# Allegro board 08_037158b.brd
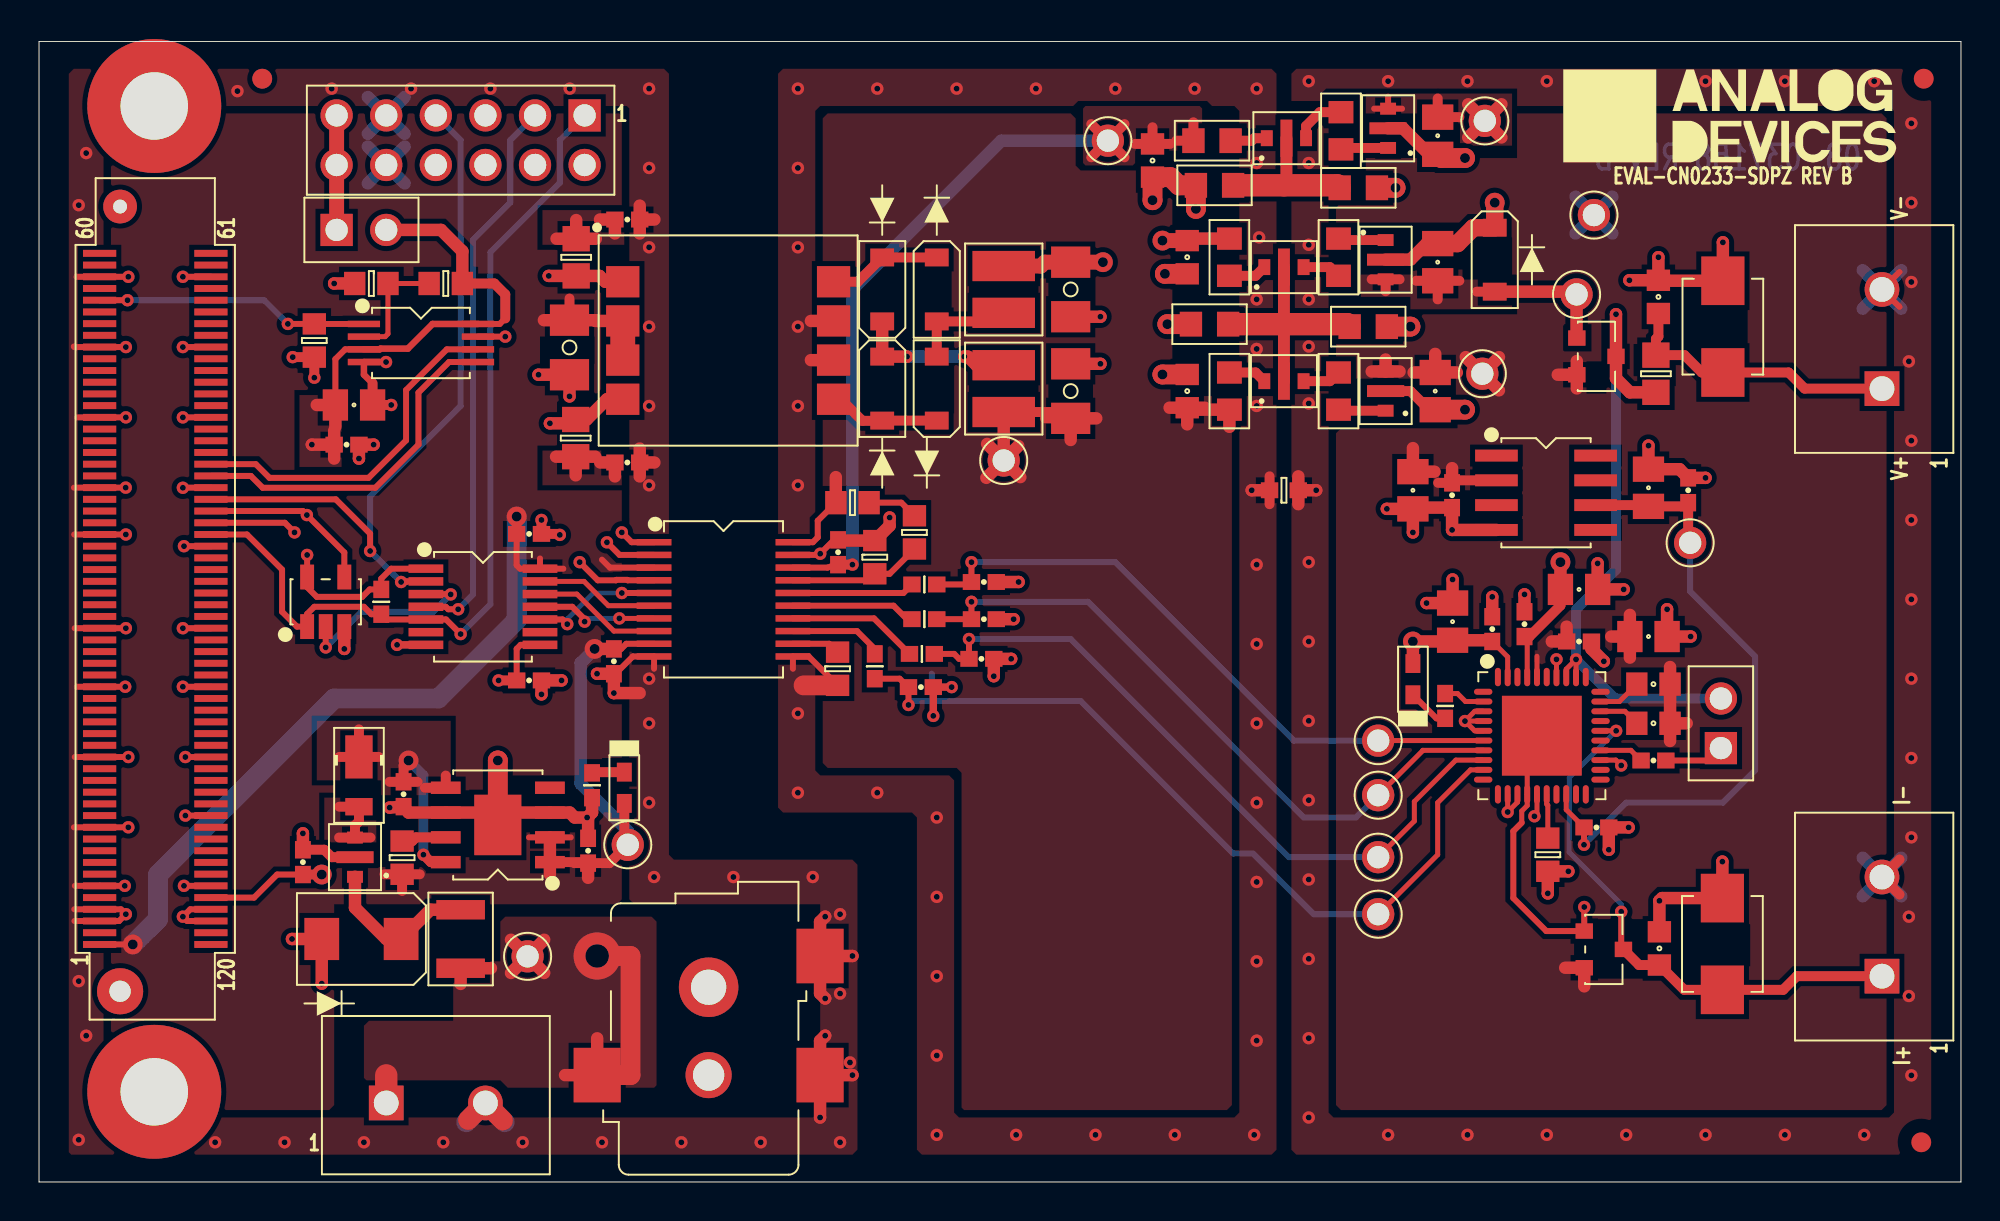
[diagram p0: board, top side]
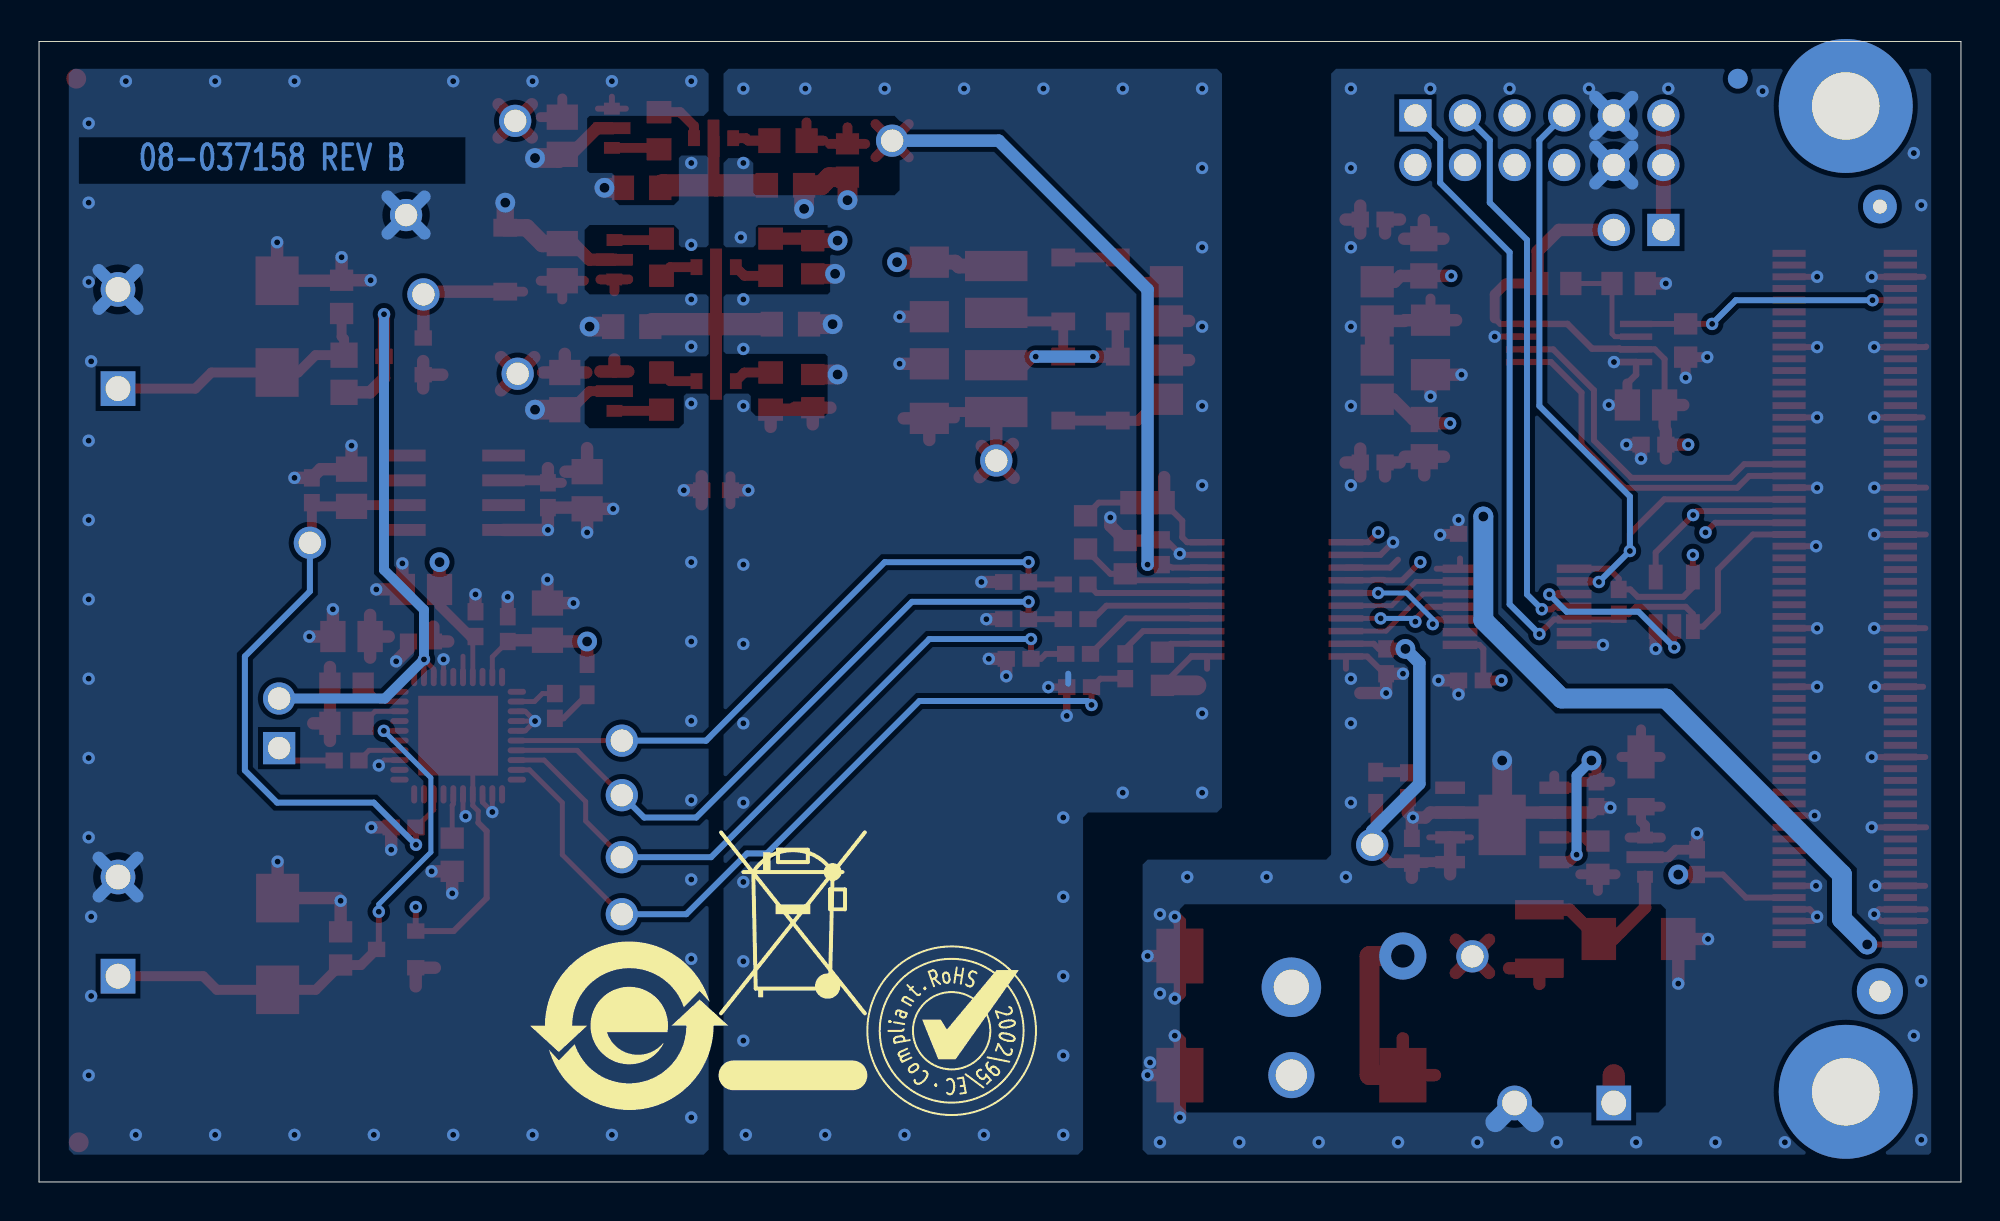
[diagram p1: board, bottom side, seen from below]

Outline 98.43 x 58.42 mm; copper layers: TOP, L2_GND, L3_PWR, BOTTOM. Coordinates in mm from the lower left corner of the outline.
Outline path: 0,58.42 0,0 98.43,0 98.43,58.42 0,58.42

## Placement (name value [footprint] x y rotation side)
AVDD  TESTPAD  [TPC65D45]  73.91 41.4 270 top
AVSS  TESTPAD  [TPC65D45]  78.74 45.47 0 top
C1  100pF  [C0402]  30.13 49.3 180 top
C2  100pF  [C0402]  30.13 36.86 180 top
C3  0.1uF  [C0402]  29.44 26.67 90 top
C4  47uF  [C1206H71]  27.17 42.75 90 top
C5  0.1uF  [C0402]  40.92 32.26 90 top
C6  1uF  [C0402]  18.67 19.86 90 top
C7  100pF  [C0402]  45.16 25.35 180 top
C8  47uF  [C1206H71]  52.83 40.51 270 top
C9  47uF  [C1206H71]  52.83 45.72 270 top
C10  100pF  [C0402]  48.26 26.8 180 top
C11  100pF  [C0402]  48.39 28.83 180 top
C12  100pF  [C0402]  48.39 30.73 180 top
C13  1uF  [C0402]  28.12 16.97 270 top
C14  1UF  [C0603]  57.02 52.32 90 top
C15  1UF  [C0603]  58.8 40.51 270 top
C16  1UF  [C0603]  58.8 47.37 270 top
C17  10uF  [C0805]  71.63 47.12 90 top
C18  10uF  [C0805]  71.63 53.59 90 top
C19  10uF  [C0805]  71.5 40.51 90 top
C20  0.1uF  [C0402]  13.51 16.38 270 top
C21  10uF  [C0805]  16.13 39.8 180 top
C22  0.1UF  [C0402]  15.75 37.77 180 top
C23  0.1uF  [C0402]  25.1 25.69 180 top
C24  0.1uF  [C0402]  25.1 33.2 180 top
C25  10uF  [C0805]  78.87 30.35 180 top
C26  0.1uF  [C0402]  76.07 28.57 270 top
C27  3900PF  [C0402]  82.68 21.59 180 top
C28  10uF  [C0805]  70.36 35.43 90 top
C29  0.1uF  [C0402]  72.36 35.18 90 top
C30  10uF  [C0805]  72.39 28.7 270 top
C31  0.1uF  [C0402]  74.42 28.32 270 top
C32  22NF  [C0603]  82.68 25.5 0 top
C33  2.2uF  [C0603]  82.68 23.49 0 top
C34  10uF  [C0805]  82.42 35.56 270 top
C35  10uF  [C0805]  82.42 27.94 180 top
C36  0.1uF  [C0402]  84.46 35.43 270 top
C37  0.1uF  [C0402]  78.87 27.69 180 top
C38  0.1uF  [C0402]  79.76 18.16 180 top
C39  100PF  [C0603]  82.93 45.34 270 top
C40  100PF  [C0603]  82.98 11.96 270 top
CR1  SMBJ5342B-TP  [DO214AA3]  16.51 12.45 180 top
CR2  BAS70-04LT1G  [SOT23-M3]  79.76 42.29 270 top
CR3  BAS70-04LT1G  [SOT23-M3]  80.14 11.91 270 top
CR4  MMSZ5253B  [SOD123-2]  74.55 47.24 270 top
D1  SBR2U30P1-7  [POWERDI123]  16.38 20.83 270 top
D2  MBR0540T1G  [SOD123-2]  43.18 45.72 90 top
D3  MBR0540T1G  [SOD123-2]  45.97 45.72 270 top
D4  MBR0540T1G  [SOD123-2]  43.18 40.64 270 top
D5  MBR0540T1G  [SOD123-2]  45.97 40.64 90 top
D6  SMBJ20CA  [DO214AA-5]  86.23 43.81 270 top
D7  SMBJ20CA  [DO214AA-5]  86.21 12.19 270 top
DS1  SML-310MTT86  [LED0603]  29.97 20.19 270 top
DS2  SML-310LTT86  [LED0603]  70.36 25.76 90 top
E1  330OHM  [L0805]  60.96 40.51 90 top
E2  330OHM  [L0805]  59.94 43.94 0 top
E3  330OHM  [L0805]  60.96 47.37 270 top
E4  330OHM  [L0805]  60.07 53.34 0 top
E5  330OHM  [L0805]  60.2 51.05 0 top
E6  330OHM  [L0805]  66.67 53.85 270 top
E7  330OHM  [L0805]  67.56 50.93 0 top
E8  330OHM  [L0805]  66.55 40.51 270 top
E9  330OHM  [L0805]  68.07 43.81 0 top
E10  330OHM  [L0805]  66.55 47.37 90 top
E12  600OHM  [L0603]  63.75 35.43 0 top
F1  0.35A  [F1210]  21.59 12.45 90 top
FL1  0.1uF  [FSM0805L79W49H34]  16.18 16.64 90 top
FL2  0.1uF  [FSM0805L79W49H34]  63.75 46.86 0 top
FL3  0.1uF  [FSM0805L79W49H34]  63.75 41.02 0 top
FL4  0.1uF  [FSM0805L79W49H34]  63.88 53.47 0 top
FL5  0.1uF  [FSM0805L79W49H34]  68.96 47.24 270 top
FL6  0.1uF  [FSM0805L79W49H34]  69.09 53.98 90 top
FL7  0.1uF  [FSM0805L79W49H34]  68.96 40.51 90 top
GND  TESTPAD  [TPC65D45]  79.63 49.53 0 top
IOUT  OSTTC022162  [CNHDR1X2H406]  94.38 10.54 90 top
L1  47uH  [L1212H59_A]  49.4 40.64 270 top
L2  47uH  [L1212H59_A]  49.4 45.72 90 top
LATCH  TESTPAD  [TPC65D45]  68.58 22.61 270 top
NOREF  -  []  98.43 0 90 top
NOREF#2  -  []  -175.26 -210.57 0 top
NOREF#3  -  []  0 2.82 0 top
NOREF#4  -  [unnamed#2]  96.52 56.52 0 top
NOREF#5  -  []  -182.88 -219.71 0 top
NOREF#6  -  [unnamed#2]  96.39 2.03 0 top
NOREF#7  -  []  -184.15 -220.98 0 top
NOREF#8  -  []  0 58.42 0 top
NOREF#9  -  []  0 0 0 top
NOREF#10  -  []  0 58.42 270 top
NOREF#11  -  []  182.25 256.79 0 top
NOREF#12  -  []  98.43 58.42 180 top
NOREF#13  -  []  11.43 56.52 0 top
NOREF#14  -  []  0 0 0 top
NOREF#15  -  []  46.35 90.81 0 top
NOREF#16  -  []  0 0 0 top
NOREF#17  -  []  98.43 58.42 0 top
NOREF#18  -  []  -37.08 257.94 0 top
NOREF#19  -  []  -125.48 250.82 0 top
NOREF#20  -  []  11.43 56.52 0 top
NOREF#21  -  []  0 58.42 0 top
NOREF#22  -  []  86.61 54.61 0 top
NOREF#23  -  [unnamed#2]  11.43 56.52 0 top
NOREF#24  -  []  93.61 0 90 top
NOREF#25  -  []  50.55 21.59 180 bottom
NOREF#26  -  []  175.39 4.57 180 bottom
NOREF#27  -  [unnamed#2]  11.43 56.52 180 bottom
NOREF#28  -  []  51.69 7.75 180 bottom
NOREF#29  -  []  68.2 8 180 bottom
P2  PJ-002A-SMT  [CN-2MM-PWR-JACK]  34.29 7.87 0 top
P3  OSTTC022162  [CNHDR1X2H406]  17.78 4.05 0 top
P4  M20-9990245  [CNHARWIN-M20-9990246]  86.13 22.23 90 top
P5  M20-9990245  [CNHARWIN-M20-9990246]  15.24 48.77 0 top
PMOD  TSW-106-14-T-D  [CNHDR2X6H420LD35_A]  27.94 54.64 180 top
R1  100K  [R0603]  20.83 46.02 180 top
R2  100K  [R0603]  14.1 43.1 270 top
R3  100K  [R0603]  17.02 46.02 180 top
R4  0  [R0805]  27.51 47.37 270 top
R5  0  [R0805]  27.48 38.11 90 top
R6  100K  [R0603]  40.89 26.29 270 top
R7  10.5K  [R0603]  42.8 32 270 top
R8  33  [R0402]  45.34 30.61 0 top
R9  33  [R0402]  45.34 28.83 0 top
R10  33  [R0402]  45.21 27.05 0 top
R11  33  [R0402]  42.8 26.42 270 top
R12  24.9K  [R0603]  44.83 33.27 90 top
R13  90.9K  [R0603]  41.66 34.8 180 top
R14  100K  [R0603]  18.59 16.61 270 top
R15  200  [R0402]  28.32 20.32 270 top
R16  10K  [R0402]  17.53 29.72 90 top
R18  200  [R0402]  72.01 24.38 270 top
R19  15K  [R0603]  77.27 16.76 90 top
R20  0  [R0805]  82.8 41.4 90 top
SCLK  TESTPAD  [TPC65D45]  68.58 19.81 270 top
SDIN  TESTPAD  [TPC65D45]  68.58 16.64 270 top
SDO  TESTPAD  [TPC65D45]  68.58 13.72 270 top
SDP  FX8-120S-SV(21)  [CNHRSFX8-120S-SV_A]  5.95 29.87 90 top
T1  KA4976-AL  [TSML394W319H235]  35.29 43.1 270 top
TP1  TESTPAD  [TPC65D45]  25.02 11.56 0 top
TP3  TESTPAD  [TPC65D45]  49.4 36.96 0 top
TP4  TESTPAD  [TPC65D45]  54.74 53.34 270 top
U1  24LC32A-I/ST  [TSSOP8]  19.56 42.98 270 top
U2  ADuM3471ARSZ  [SSOP20-4]  35.05 29.84 270 top
U3  SN74LVC1G125DBV  [SOT23-M12]  14.68 29.72 0 top
U4  TXB0104PWR  [TSSOP14]  22.73 29.46 270 top
U5  AD5422BCPZ  [QFN40_6X6_PAD4_1X4_1]  76.96 22.86 270 top
U6  ADP7104ARDZ-5.0  [SO8NB-PAD3_1X2_41]  23.49 18.29 90 top
U7  ADR445BRZ  [SO8]  77.18 35.31 270 top
UNK+5V  TESTPAD  [TPC65D45]  74.04 54.36 270 top
UNK+5VA  TESTPAD  [TPC65D45]  30.15 17.27 270 top
UNK+5VREF  TESTPAD  [TPC65D45]  84.56 32.74 270 top
VOUT  OSTTC022162  [CNHDR1X2H406]  94.38 40.64 90 top

## Library data of the parts
AVDD AVSS GND LATCH SCLK SDIN SDO TP1 TP3 TP4 UNK+5V UNK+5VA UNK+5VREF = NCTESTPAD: User Part Number: UPN; part number: NCTESTPAD_TH-TESTPAD,E013404,P/O PCB,NONE,SCD-013902,TPC65D45,N/A
C1 C2 C7 C10-C12 = CAP: Tolerance: 5; User Part Number: UPN; alternate symbols: (C0402H22_ALT,C0201-2,C0402_A,C0402_ALT); part number: CAP_SM-100PF,50V,5,E007896,C0402; tolerance: 5
C3 C5 C20 C23 C24 C26 C29 C31 C36-C38 = CAP: Tolerance: -20/+80; User Part Number: UPN; alternate symbols: (C0402H22_ALT,C0201-2,C0402_A,C0402_ALT); part number: CAP_SM-0.1UF,25V,-20/+80,E011876,C0402; tolerance: -20/+80
C4 C8 C9 = CAP: Tolerance: 20; User Part Number: UPN; alternate symbols: (C0402H22_ALT,C0201-2,C0402_A,C0402_ALT); part number: CAP_SM-47UF,16V,20,E019684,C1206H71; tolerance: 20
C6 C13 = CAP: Tolerance: 10; User Part Number: UPN; alternate symbols: (C0402H22_ALT,C0201-2,C0402_A,C0402_ALT); part number: CAP_SM-1UF,16V,10,E019219,C0402; tolerance: 10
C14-C16 = CAP: Tolerance: 10; User Part Number: UPN; alternate symbols: (C0402H22_ALT,C0201-2,C0402_A,C0402_ALT); part number: CAP_SM-1UF,25V,10,E006992,C0603; tolerance: 10
C17-C19 C21 C25 C28 C30 C34 C35 = CAP: Tolerance: 10; User Part Number: UPN; alternate symbols: (C0402H22_ALT,C0201-2,C0402_A,C0402_ALT); part number: CAP_SM-10UF,25V,10,E019080,C0805; tolerance: 10
C22 = CAP: Tolerance: 10; User Part Number: UPN; alternate symbols: (C0402H22_ALT,C0201-2,C0402_A,C0402_ALT); part number: CAP_SM-0.1UF,16V,10,E007200,C0402; tolerance: 10
C27 = CAP: Tolerance: 10; User Part Number: UPN; alternate symbols: (C0402H22_ALT,C0201-2,C0402_A,C0402_ALT); part number: CAP_SM-3900PF,25V,10,E000300,C0402; tolerance: 10
C32 = CAP: Tolerance: 10; User Part Number: UPN; alternate symbols: (C0402H22_ALT,C0201-2,C0402_A,C0402_ALT); part number: CAP_SM-22NF,16V,10,E000327,C0603; tolerance: 10
C33 = CAP: Tolerance: 10; User Part Number: UPN; alternate symbols: (C0402H22_ALT,C0201-2,C0402_A,C0402_ALT); part number: CAP_SM-2.2UF,10V,10,E015288,C0603; tolerance: 10
C39 C40 = CAP: Tolerance: 5; User Part Number: UPN; alternate symbols: (C0402H22_ALT,C0201-2,C0402_A,C0402_ALT); part number: CAP_SM-100PF,50V,5,E000415,C0603; tolerance: 5
CR1 = DIOZNR: User Part Number: UPN; Tolerance: 5; part number: DIOZNR_SM-SMBJ5342B-TP,6.8V,5,E019336,DO214AA3; tolerance: 5
CR2 CR3 = DIOSCHOTTKY3P_V7: User Part Number: UPN; Tolerance: N/A; part number: DIOSCHOTTKY3P_V7_SM-BAS70-04LT1G,70V,N/A,E018685,SOT23-M3; tolerance: N/A
CR4 = DIOZNR: User Part Number: UPN; Tolerance: 5; part number: DIOZNR_SM-MMSZ5253B,25V,5,E020097,SOD123-2; tolerance: 5
D1 = DIO: User Part Number: UPN; Tolerance: N/A; alternate symbols: (DO15_ALT); part number: DIO_SM-SBR2U30P1-7,30V,N/A,E016912,POWERDI123; tolerance: N/A
D2-D5 = DIOSCHOTTKY: User Part Number: UPN; Tolerance: N/A; part number: DIOSCHOTTKY_SM-MBR0540T1G,40V,N/A,E011535,SOD123-2; tolerance: N/A
D6 D7 = DIO_V3: Tolerance: N/A; User Part Number: UPN; part number: DIO_V3_SM-SMBJ20CA,20V,N/A,E014113,DO214AA-5; tolerance: N/A
DS1 = DIOLED: Tolerance: N/A; User Part Number: UPN; part number: DIOLED_SM-SML-310MTT86,2.8V,N/A,E001179,LED0603; tolerance: N/A
DS2 = DIOLED: Tolerance: N/A; User Part Number: UPN; part number: DIOLED_SM-SML-310LTT86,2.5V,N/A,E001178,LED0603; tolerance: N/A
E1-E10 = FERRITE: Tolerance: 25; User Part Number: UPN; part number: FERRITE_SM-330OHM,25,E018120,L0805; tolerance: 25
E12 = FERRITE: Tolerance: 25; User Part Number: UPN; part number: FERRITE_SM-600OHM,25,E019248,L0603; tolerance: 25
F1 = FSFUSE: User Part Number: UPN; part number: FSFUSE_SM-0.35A,6V,E016918,LITTELFUSE,1210L035YR,SCD-015992,F1210,N/A
FL1-FL7 = FLTR3P: Tolerance: 20; User Part Number: UPN; part number: FLTR3P_SM-0.1UF,E010964,FSM0805L79W49H34; tolerance: 20
IOUT P3 VOUT = CN2P: User Part Number: UPN; part number: CN2P_TH-OSTTC022162,E016936,ON SHORE TECHNOLOGY INC,OSTTC022162,SCD-016004,CNHDR1X2H406
L1 L2 = IND: User Part Number: UPN; Tolerance: 20; alternate symbols: (L0402-2,L0603_ALT); part number: IND_SM-47UH,20,E017337,L1212H59_A; tolerance: 20
P2 = CN3P_V6: User Part Number: UPN; part number: CN3P_V6_TH-PJ-002A-SMT,E017261,CN-2MM-PWR-JACK
P4 P5 = CN2P: User Part Number: UPN; part number: CN2P_TH-M20-9990245,E019487,HARWIN,M20-9990245,SCD-012484,CNHARWIN-M20-9990246
PMOD = CN12P_V3: User Part Number: UPN; part number: CN12P_V3_TH-TSW-106-14-T-D,E015161,CNHDR2X6H420LD35_A
R1-R3 R6 R14 = RES: Tolerance: 1; User Part Number: UPN; alternate symbols: (RRAD984L1500W75H520LD32;TO220H590_ALT;R0402_A;R0603_A); part number: RES_SM-100K,E010279,1/10W,1,PANASONIC,ERJ-3EKF1003V,SCD-001006,R0603,N/A; tolerance: 1
R4 R5 R20 = RES: Tolerance: 1; User Part Number: UPN; alternate symbols: (RRAD984L1500W75H520LD32;TO220H590_ALT;R0402_A;R0603_A); part number: RES_SM-0,E004152,1/10W,1,MULTICOMP,MC 0.1W 0805 0R.,SCD-003454,R0805,N/A; tolerance: 1
R7 = RES: Tolerance: 0.1; User Part Number: UPN; alternate symbols: (RRAD984L1500W75H520LD32;TO220H590_ALT;R0402_A;R0603_A); part number: RES_SM-10.5K,E018488,1/10W,0.1,PANASONIC,ERA-3AEB1052V,SCD-001690,R0603,N/A; tolerance: 0.1
R8-R11 = RES: Tolerance: 5; User Part Number: UPN; alternate symbols: (RRAD984L1500W75H520LD32;TO220H590_ALT;R0402_A;R0603_A); part number: RES_SM-33,E003452,1/16W,5,PANASONIC,ERJ-2GEJ330X,SCD-002744,R0402,N/A; tolerance: 5
R12 = RES: Tolerance: 0.5; User Part Number: UPN; alternate symbols: (RRAD984L1500W75H520LD32;TO220H590_ALT;R0402_A;R0603_A); part number: RES_SM-24.9K,E011717,1/16W,0.5,SUSUMU,RR0816P-2492-D-39C,SCD-002423,R0603,N/A; tolerance: 0.5
R13 = RES: Tolerance: 0.1; User Part Number: UPN; alternate symbols: (RRAD984L1500W75H520LD32;TO220H590_ALT;R0402_A;R0603_A); part number: RES_SM-90.9K,E018389,1/10W,0.1,PANASONIC,ERA-3AEB9092V,SCD-001190,R0603,N/A; tolerance: 0.1
R15 R18 = RES: Tolerance: 0.1; User Part Number: UPN; alternate symbols: (RRAD984L1500W75H520LD32;TO220H590_ALT;R0402_A;R0603_A); part number: RES_SM-200,E006431,1/16W,0.1,SUSUMU,RG1005P-201-B-T5,SCD-002504,R0402,N/A; tolerance: 0.1
R16 = RES: Tolerance: 0.1; User Part Number: UPN; alternate symbols: (RRAD984L1500W75H520LD32;TO220H590_ALT;R0402_A;R0603_A); part number: RES_SM-10K,E012474,1/16W,0.1,VISHAY,TNPW040210K0BEED,SCD-003272,R0402,N/A; tolerance: 0.1
R19 = RES: Tolerance: 0.1; User Part Number: UPN; alternate symbols: (RRAD984L1500W75H520LD32;TO220H590_ALT;R0402_A;R0603_A); part number: RES_SM-15K,E019547,1/10W,0.1,YAGEO,RT0603BRB0715KL,SCD-002985,R0603,N/A; tolerance: 0.1
SDP = CN120P_V4: User Part Number: UPN; part number: CN120P_V4_SM-FX8-120S-SV(21),E016993,CNHRSFX8-120S-SV_A
T1 = XFMRKA4976: User Part Number: UPN; part number: XFMRKA4976_SM-KA4976-AL,E017329,TSML394W319H235
U1 = IC24FC256: User Part Number: UPN; part number: IC24FC256_SM-24LC32A-I/ST,E014553,TSSOP8
U2 = ADUM3471: User Part Number: UPN; part number: ADUM3471_SM-ADUM3471ARSZ,E017340,SSOP20-4,N/A
U3 = SN74LVC1G125DBV: User Part Number: UPN; part number: SN74LVC1G125DBV_SM-SN74LVC1G125DBV,E002344,SOT23-M12
U4 = TXB0104: User Part Number: UPN; part number: TXB0104_SM-TXB0104PWR,E006113,TSSOP14
U5 = AD54X2: User Part Number: UPN; part number: AD54X2_SM-AD5422BCPZ,E019445,QFN40_6X6_PAD4_1X4_1,N/A
U6 = ADP7104: User Part Number: UPN; part number: ADP7104_SM-ADP7104ARDZ-5.0,E016720,SO8NB-PAD3_1X2_41,N/A
U7 = ADR441: User Part Number: UPN; part number: ADR441_SM-ADR445BRZ,E012504,SO8,N/A

## Footprints (pads in the part's own frame, mm; a bottom-side part is the same pattern mirrored in y, then rotated)
C0402
  rect 0.889x0.813 smd: 1(-0.635,0) 2(0.635,0)
C0603
  rect 1.092x1.194 smd: 1(-0.851,0) 2(0.851,0)
C0805
  rect 1.295x1.6 smd: 1(-0.953,0) 2(0.953,0)
C1206H71
  rect 1.6x2.007 smd: 1(-1.397,0) 2(1.397,0)
CN-2MM-PWR-JACK
  round 3.048 hole 1.803 unplated: (0,2.101)
  round 2.362 hole 1.6 unplated: (0,-2.4)
  rect 2.413x2.794 smd: 1(-5.707,-2.4) 2(5.707,-2.4) 3(5.707,3.701)
CNHARWIN-M20-9990246
  rect 1.651x1.651 hole 1.143: 1(0,0)
  round 1.651 hole 1.143: 2(2.54,0)
CNHDR1X2H406
  rect 1.778x1.778 hole 1.27: 1(0,0)
  round 1.778 hole 1.27: 2(5.08,0)
CNHDR2X6H420LD35_A
  rect 1.651x1.651 hole 1.143: 1(0,0)
  round 1.651 hole 1.143: 2(2.54,0) 3(5.08,0) 4(7.62,0) 5(10.16,0) 6(12.7,0) 7(0,2.54) 8(2.54,2.54) 9(5.08,2.54) 10(7.62,2.54) 11(10.16,2.54) 12(12.7,2.54)
CNHRSFX8-120S-SV_A
  round 6.858 hole 3.454 unplated: (-25.25,0.051) (25.25,0.051)
  round 2.362 hole 1.092 unplated: (-20.099,1.801)
  round 1.727 hole 0.711 unplated: (20.099,1.801)
  rect 0.356x1.702 smd: 1(-17.701,2.85) 2(-17.099,2.85) 3(-16.5,2.85) 4(-15.9,2.85) 5(-15.301,2.85) 6(-14.699,2.85) 7(-14.1,2.85) 8(-13.5,2.85) 9(-12.901,2.85) 10(-12.301,2.85) 11(-11.699,2.85) 12(-11.1,2.85) 13(-10.5,2.85) 14(-9.901,2.85) 15(-9.299,2.85) 16(-8.7,2.85) 17(-8.1,2.85) 18(-7.501,2.85) 19(-6.901,2.85) 20(-6.299,2.85) 21(-5.7,2.85) 22(-5.1,2.85) 23(-4.501,2.85) 24(-3.899,2.85) 25(-3.299,2.85) 26(-2.7,2.85) 27(-2.101,2.85) 28(-1.501,2.85) 29(-0.899,2.85) 30(-0.3,2.85) 31(0.3,2.85) 32(0.899,2.85) 33(1.501,2.85) 34(2.101,2.85) 35(2.7,2.85) 36(3.299,2.85) 37(3.899,2.85) 38(4.501,2.85) 39(5.1,2.85) 40(5.7,2.85) 41(6.299,2.85) 42(6.901,2.85) 43(7.501,2.85) 44(8.1,2.85) 45(8.7,2.85) 46(9.299,2.85) 47(9.901,2.85) 48(10.5,2.85) 49(11.1,2.85) 50(11.699,2.85) 51(12.301,2.85) 52(12.901,2.85) 53(13.5,2.85) 54(14.1,2.85) 55(14.699,2.85) 56(15.301,2.85) 57(15.9,2.85) 58(16.5,2.85) 59(17.099,2.85) 60(17.701,2.85) 61(17.701,-2.85) 62(17.099,-2.85) 63(16.5,-2.85) 64(15.9,-2.85) 65(15.301,-2.85) 66(14.699,-2.85) 67(14.1,-2.85) 68(13.5,-2.85) 69(12.901,-2.85) 70(12.301,-2.85) 71(11.699,-2.85) 72(11.1,-2.85) 73(10.5,-2.85) 74(9.901,-2.85) 75(9.299,-2.85) 76(8.7,-2.85) 77(8.1,-2.85) 78(7.501,-2.85) 79(6.901,-2.85) 80(6.299,-2.85) 81(5.7,-2.85) 82(5.1,-2.85) 83(4.501,-2.85) 84(3.899,-2.85) 85(3.299,-2.85) 86(2.7,-2.85) 87(2.101,-2.85) 88(1.501,-2.85) 89(0.899,-2.85) 90(0.3,-2.85) 91(-0.3,-2.85) 92(-0.899,-2.85) 93(-1.501,-2.85) 94(-2.101,-2.85) 95(-2.7,-2.85) 96(-3.299,-2.85) 97(-3.899,-2.85) 98(-4.501,-2.85) 99(-5.1,-2.85) 100(-5.7,-2.85) 101(-6.299,-2.85) 102(-6.901,-2.85) 103(-7.501,-2.85) 104(-8.1,-2.85) 105(-8.7,-2.85) 106(-9.299,-2.85) 107(-9.901,-2.85) 108(-10.5,-2.85) 109(-11.1,-2.85) 110(-11.699,-2.85) 111(-12.301,-2.85) 112(-12.901,-2.85) 113(-13.5,-2.85) 114(-14.1,-2.85) 115(-14.699,-2.85) 116(-15.301,-2.85) 117(-15.9,-2.85) 118(-16.5,-2.85) 119(-17.099,-2.85) 120(-17.701,-2.85)
DO214AA3
  rect 1.778x2.159 smd: A(2.032,0) C(-2.032,0)
DO214AA-5
  rect 2.489x2.21 smd: 1(-2.349,0) 2(2.349,0)
F1210
  rect 0.991x2.489 smd: 1(-1.499,0) 2(1.499,0)
FSM0805L79W49H34
  rect 0.61x0.813 smd: 1(-1.006,0) 3(1.006,0)
  rect 0.61x1.905 smd: 2(0,0)
L0603
  rect 0.889x0.813 smd: 1(-0.737,0) 2(0.737,0)
L0805
  rect 1.143x1.27 smd: 1(-0.953,0) 2(0.953,0)
L1212H59_A
  rect 1.549x3.2 smd: 1(-1.199,0) 2(1.199,0)
LED0603
  rect 0.965x0.762 smd: A(0.8,0) C(-0.8,0)
POWERDI123
  rect 0.889x1.397 smd: A(1.605,0)
  rect 2.21x1.397 smd: C(-0.945,0)
QFN40_6X6_PAD4_1X4_1
  oval 0.305x0.94 smd: 1(-2.25,-3.005) 2(-1.75,-3.005) 3(-1.25,-3.005) 4(-0.749,-3.005) 5(-0.249,-3.005) 6(0.249,-3.005) 7(0.749,-3.005) 8(1.25,-3.005) 9(1.75,-3.005) 10(2.25,-3.005) 21(2.25,3.005) 22(1.75,3.005) 23(1.25,3.005) 24(0.749,3.005) 25(0.249,3.005) 26(-0.249,3.005) 27(-0.749,3.005) 28(-1.25,3.005) 29(-1.75,3.005) 30(-2.25,3.005)
  oval 0.94x0.305 smd: 11(3.005,-2.25) 12(3.005,-1.75) 13(3.005,-1.25) 14(3.005,-0.749) 15(3.005,-0.249) 16(3.005,0.249) 17(3.005,0.749) 18(3.005,1.25) 19(3.005,1.75) 20(3.005,2.25) 31(-3.005,2.25) 32(-3.005,1.75) 33(-3.005,1.25) 34(-3.005,0.749) 35(-3.005,0.249) 36(-3.005,-0.249) 37(-3.005,-0.749) 38(-3.005,-1.25) 39(-3.005,-1.75) 40(-3.005,-2.25)
  rect 4.089x4.089 smd: PAD(0,0)
R0402
  rect 0.889x0.813 smd: 1(-0.635,0) 2(0.635,0)
R0603
  rect 1.092x1.194 smd: 1(-0.851,0) 2(0.851,0)
R0805
  rect 1.295x1.397 smd: 1(-0.953,0) 2(0.953,0)
SO8
  rect 0.61x2.184 smd: 1(-1.905,-2.54) 2(-0.635,-2.54) 3(0.635,-2.54) 4(1.905,-2.54) 5(1.905,2.54) 6(0.635,2.54) 7(-0.635,2.54) 8(-1.905,2.54)
SO8NB-PAD3_1X2_41
  rect 0.635x1.524 smd: 1(-1.905,-2.667) 2(-0.635,-2.667) 3(0.635,-2.667) 4(1.905,-2.667) 5(1.905,2.667) 6(0.635,2.667) 7(-0.635,2.667) 8(-1.905,2.667)
  rect 3.099x2.413 smd: PAD(0,0)
SOD123-2
  rect 0.914x1.219 smd: A(1.638,0) C(-1.638,0)
SOT23-M3
  rect 0.787x0.889 smd: 1(-0.94,-1.003) 2(0.94,-1.003) 3(0,1.003)
SOT23-M12
  rect 0.711x1.27 smd: 1(-0.953,-1.27) 2(0,-1.27) 3(0.953,-1.27) 4(0.953,1.27) 5(-0.953,1.27)
SSOP20-4
  rect 0.33x1.778 smd: 1(-2.926,-3.556) 2(-2.276,-3.556) 3(-1.626,-3.556) 4(-0.975,-3.556) 5(-0.325,-3.556) 6(0.325,-3.556) 7(0.975,-3.556) 8(1.626,-3.556) 9(2.276,-3.556) 10(2.926,-3.556) 11(2.926,3.556) 12(2.276,3.556) 13(1.626,3.556) 14(0.975,3.556) 15(0.325,3.556) 16(-0.325,3.556) 17(-0.975,3.556) 18(-1.626,3.556) 19(-2.276,3.556) 20(-2.926,3.556)
TPC65D45
  round 1.651 hole 1.143: 1(0,0)
TSML394W319H235
  rect 1.6x1.702 smd: 1(-3.01,-5.397) 2(-1.003,-5.397) 3(1.003,-5.397) 4(3.01,-5.397) 5(3.01,5.397) 6(1.003,5.397) 7(-1.003,5.397) 8(-3.01,5.397)
TSSOP8
  rect 0.33x1.651 smd: 1(-0.975,-2.921) 2(-0.325,-2.921) 3(0.325,-2.921) 4(0.975,-2.921) 5(0.975,2.921) 6(0.325,2.921) 7(-0.325,2.921) 8(-0.975,2.921)
TSSOP14
  rect 0.432x1.778 smd: 1(-1.951,-2.921) 2(-1.3,-2.921) 3(-0.65,-2.921) 4(0,-2.921) 5(0.65,-2.921) 6(1.3,-2.921) 7(1.951,-2.921) 8(1.951,2.921) 9(1.3,2.921) 10(0.65,2.921) 11(0,2.921) 12(-0.65,2.921) 13(-1.3,2.921) 14(-1.951,2.921)
unnamed#2
  round 1.016 smd: (0,0)

## Nets
+3.3VIO: C20.2(N2) C21.2(N2) C22.2(N2) C23.2(N2) P5.2(N2) R1.1(N1) R16.2(N2) SDP.116(VIO(+3.3V)) U1.3(A2) U1.8(VCC) U3.5(VCC) U4.1(VCCA) U4.8(OE)
+5V: C3.2(N2) C4.2(N2) C13.2(N2) C24.2(N2) DS1.A(P) R14.2(N2) SDP.1(VIN) T1.2(PRIP1) T1.3(PRIN2) U2.3(VDD1) U2.9(VDDA) U4.14(VCCB) U6.1(VOUT) U6.2(SENSE) UNK+5VA.1
+5VA: C5.1(N1) C14.2(N2) E4.1(N1) TP4.1(N1) U2.18(VDD2)
+5VA_ISO: C18.2(N2) C30.2(N2) C31.2(N2) DS2.A(P) FL6.3(OUT) U5.39(DVCC) UNK+5V.1
AGND: C5.2(N2) C7.1(N1) C8.1(N1) C9.2(N2) C10.1(N1) C11.1(N1) C12.1(N1) C14.1(N1) C15.1(N1) C16.2(N2) E2.1(N1) E5.1(N1) E12.1(N1) R6.2(N2) R7.1(N1) T1.6(SECP1) T1.7(SECN2) U2.11(GND2_1) U2.19(GND2_2)
AVDD: C8.2(N2) C15.2(N2) E1.1(N1) L1.2(N2) R13.2(N2) TP3.1(N1) U2.20(VREG)
AVDD_ISO: AVDD.1(N1) C19.2(N2) C28.2(N2) C29.2(N2) C32.2(N2) C33.2(N2) C35.2(N2) C37.2(N2) CR2.2(P2) CR3.2(P2) FL7.3(OUT) U5.36(AVDD) U7.2(VIN)
AVSS: C9.1(N1) C16.1(N1) E3.1(N1) L2.2(N2)
AVSS_ISO: AVSS.1(N1) C17.1(N1) C25.2(N2) C26.2(N2) CR2.1(P1) CR3.1(P1) CR4.A(P) FL5.3(OUT) U5.14(AVSS1) U5.37(AVSS2) U5.PAD
DGND: C1.1(N1) C2.1(N1) C3.1(N1) C4.1(N1) C6.1(N1) C13.1(N1) C20.1(N1) C21.1(N1) C22.1(N1) C23.1(N1) C24.1(N1) CR1.A(P) FL1.2(GND) P2.2(N2) P2.3(N3) P3.2(N2) PMOD.5(GND1) PMOD.11(GND2) R2.2(N2) R3.2(N2) R15.2(N2) SDP.3(GND1) SDP.4(GND2) SDP.6(GND3) SDP.11(GND4) SDP.17(GND5) SDP.23(GND6) SDP.28(GND7) SDP.36(GND8) SDP.40(GND9) SDP.46(GND10) SDP.52(GND11) SDP.58(GND12) SDP.63(GND13) SDP.69(GND14) SDP.75(GND15) SDP.81(GND16) SDP.86(GND17) SDP.93(GND18) SDP.98(GND19) SDP.104(GND20) SDP.109(GND21) SDP.115(GND22) SDP.117(GND23) SDP.118(GND24) U1.4(VSS) U1.7(WP) U2.2(GND1_1) U2.10(GND1_2) U3.3(GND) U4.7(GND) U6.3(GND1) U6.6(GND2) U6.PAD
GND_ISO: C17.2(N2) C18.1(N1) C19.1(N1) C25.1(N1) C26.1(N1) C28.1(N1) C29.1(N1) C30.1(N1) C31.1(N1) C34.1(N1) C35.1(N1) C36.1(N1) C37.1(N1) C38.1(N1) C39.1(N1) C40.1(N1) CR4.C(N) D6.1(N1) D7.1(N1) E7.2(N2) E9.2(N2) E12.2(N2) FL5.2(GND) FL6.2(GND) FL7.2(GND) GND.1(N1) IOUT.2(N2) R19.1(N1) U5.3(GND1) U5.4(CLEAR SELECT) U5.5(CLEAR) U5.12(GND2) U5.13(GND3) U5.15(GND4) U5.23(DVCC SELECT) U5.34(-VSENSE) U7.4(GND) VOUT.2(N2)
LATCH: U2.5(VIA) U4.10(B4)
LATCH_ISO: C12.2(N2) LATCH.1(N1) R8.2(N2) U5.6(LATCH)
LATCH_SDP: PMOD.1(P1) R16.1(N1) SDP.85(SPI_SEL_A) U3.1(OE*) U4.5(A4)
SCL_0: SDP.79(SCL_0) U1.6(SCL)
SCLK: U2.6(VIB) U4.13(B1)
SCLK_ISO: C11.2(N2) R9.2(N2) SCLK.1(N1) U5.7(SCLK)
SCLK_SDP: PMOD.4(P4) SDP.82(SPI_CLK) U4.2(A1)
SDA_0: SDP.80(SDA_0) U1.5(SDA)
SDIN: U2.7(VIC) U4.11(B3)
SDIN_ISO: C10.2(N2) R10.2(N2) SDIN.1(N1) U5.8(SDIN)
SDIN_SDP: PMOD.2(P2) SDP.84(SPI_MOSI) U4.4(A3)
SDO: U2.8(VOD) U4.12(B2)
SDO_ISO: C7.2(N2) R11.2(N2) SDO.1(N1) U5.9(SDO)
SDO_SDP: PMOD.3(P3) SDP.83(SPI_MISO) U3.4(Y)
UNNAMED_2_AD54X2_I3_: CR2.3(N) P4.2(N2) R20.1(N1) U5.32(VOUT) U5.33(+VSENSE)
UNNAMED_2_AD54X2_I3_CAP1: C33.1(N1) U5.28(CAP1)
UNNAMED_2_AD54X2_I3_CAP2: C32.1(N1) U5.29(CAP2)
UNNAMED_2_AD54X2_I3_CCOMP: C27.2(N2) U5.24(CCOMP)
UNNAMED_2_AD54X2_I3_FAULTN: R18.1(N1) U5.2(FAULT_N)
UNNAMED_2_AD54X2_I3_IOUT: C40.2(N2) CR3.3(N) D7.2(N2) IOUT.1(N1) U5.26(IOUT)
UNNAMED_2_AD54X2_I3_REFIN: C34.2(N2) C36.2(N2) C38.2(N2) U5.18(REFIN) U7.6(VOUT) UNK+5VREF.1
UNNAMED_2_AD54X2_I3_RSET: R19.2(N2) U5.16(RSET)
UNNAMED_2_CAP_I65_N1: C27.1(N1) P4.1(N1)
UNNAMED_2_CAP_I160_N2: C39.2(N2) D6.2(N2) R20.2(N2) VOUT.1(N1)
UNNAMED_2_DIOLED_I147_N: DS2.C(N) R18.2(N2)
UNNAMED_3_ADP7104_I58_PG: R14.1(N1) U6.7(PG)
UNNAMED_3_ADP7104_I58_VIN: C6.2(N2) D1.C(N) U6.5(EN) U6.8(VIN)
UNNAMED_3_ADUM3471_I1_FB: R7.2(N2) R12.1(N1) U2.17(FB)
UNNAMED_3_ADUM3471_I1_OC: R6.1(N1) U2.12(OC)
UNNAMED_3_ADUM3471_I1_VID: R11.1(N1) U2.13(VID)
UNNAMED_3_ADUM3471_I1_VOA: R8.1(N1) U2.16(VOA)
UNNAMED_3_ADUM3471_I1_VOB: R9.1(N1) U2.15(VOB)
UNNAMED_3_ADUM3471_I1_VOC: R10.1(N1) U2.14(VOC)
UNNAMED_3_ADUM3471_I1_X1: R5.2(N2) T1.4(PRIP2) U2.1(X1)
UNNAMED_3_ADUM3471_I1_X2: R4.2(N2) T1.1(PRIN1) U2.4(X2)
UNNAMED_3_CAP_I104_N2: C1.2(N2) R4.1(N1)
UNNAMED_3_CAP_I112_N2: C2.2(N2) R5.1(N1)
UNNAMED_3_CN2P_I172_N1: F1.1(N1) P2.1(N1) P3.1(N1) TP1.1(N1)
UNNAMED_3_DIO_I9_P: D1.A(P) FL1.3(OUT)
UNNAMED_3_DIOLED_I143_N: DS1.C(N) R15.1(N1)
UNNAMED_3_DIOSCHOTTKY_I14_P: D2.A(P) D3.C(N) T1.8(SECP2)
UNNAMED_3_DIOSCHOTTKY_I15_P: D3.A(P) D5.A(P) L2.1(N1)
UNNAMED_3_DIOSCHOTTKY_I115_N: D2.C(N) D4.C(N) L1.1(N1)
UNNAMED_3_DIOSCHOTTKY_I115_P: D4.A(P) D5.C(N) T1.5(SECN1)
UNNAMED_3_DIOZNR_I6_N: CR1.C(N) F1.2(N2) FL1.1(IN)
UNNAMED_3_FERRITE_I80_N2: E1.2(N2) FL3.1(IN)
UNNAMED_3_FERRITE_I81_N2: E2.2(N2) E9.1(N1) FL2.2(GND) FL3.2(GND)
UNNAMED_3_FERRITE_I82_N2: E3.2(N2) FL2.1(IN)
UNNAMED_3_FERRITE_I87_N1: E8.1(N1) FL3.3(OUT)
UNNAMED_3_FERRITE_I87_N2: E8.2(N2) FL7.1(IN)
UNNAMED_3_FERRITE_I89_N1: E10.1(N1) FL2.3(OUT)
UNNAMED_3_FERRITE_I89_N2: E10.2(N2) FL5.1(IN)
UNNAMED_3_FERRITE_I120_N1: E6.1(N1) FL4.3(OUT)
UNNAMED_3_FERRITE_I120_N2: E6.2(N2) FL6.1(IN)
UNNAMED_3_FERRITE_I121_N1: E5.2(N2) E7.1(N1) FL4.2(GND)
UNNAMED_3_FERRITE_I125_N2: E4.2(N2) FL4.1(IN)
UNNAMED_3_RES_I34_N2: R12.2(N2) R13.1(N1)
UNNAMED_4_CN12PV3_I72_VCC1: P5.1(N1) PMOD.6(VCC1) PMOD.12(VCC2)
UNNAMED_4_CN120PV4_I1_EEPROMA0: R2.1(N1) SDP.56(EEPROM_A0) U1.1(A0)
UNNAMED_4_IC24FC256_I3_A1: R1.2(N2) R3.1(N1) U1.2(A1)
UNNAMED_4_SN74LVC1G125DBV_I36_A: U3.2(A) U4.3(A2)

Pads without a net: PMOD 7 8 9 10; SDP 2 5 7 8 9 10 12 13 14 15 16 18 19 20 21 22 24 25 26 27 29 30 31 32 33 34 35 37 38 39 41 42 43 44 45 47 48 49 50 51 53 54 55 57 59 60 61 62 64 65 66 67 68 70 71 72 73 74 76 77 78 87 88 89 90 91 92 94 95 96 97 99 100 101 102 103 105 106 107 108 110 111 112 113 114 119 120; U4 6 9; U5 1 10 11 17 19 20 21 22 25 27 30 31 35 38 40; U6 4; U7 1 3 5 7 8

## Via types
v1: diameter 0.635, hole 0.305, TOP to BOTTOM, 237 vias
v2: diameter 2.413, hole 1.206, TOP to BOTTOM, 1 via
v3: diameter 1.016, hole 0.508, TOP to BOTTOM, 20 vias

## Routing (per net, layer and track width the routed paths; a pad name or vN(x,y) marks a point on that pad's centre or on a via; arc(x,y) is an arc through that point)
+3.3VIO: length 50.4
  TOP w0.305: U4.8 24.66,27.51 24.46,27.31 C23.2 ; v1(13.73,32.12) U3.5 13.73,30.47 14.22,29.97 16.55,29.97 16.93,30.35 R16.2 17.53,30.91 18.03,31.41 U4.1 ; U1.8 23.59,43.95 23.88,44.24 ; U1.3 15.68,42.65 15.18,42.15 C21.2 ; SDP.116 11.01,14.57 12.19,15.75 13.51,15.75
  TOP w0.33: U1.8 20.15,43.95 18.89,42.69 17.49,42.69 17.45,42.65 U1.3
  TOP w0.508: 13.51,15.75 v3(14.48,15.75) ; R1.1 23.32,46.02 23.88,45.47 23.88,44.24 ; C23.2 v1(23.53,25.69)
  TOP w0.635: R1.1 21.68,47.68 20.59,48.77 P5.2 ; C22.2 v1(13.97,37.77) ; C22.2 15.11,38.48 ; C22.2 15.11,37.06 ; 15.18,38.69 C21.2 14.22,39.8
  L3_PWR w0.635: P5.2 16.84,49.71 ; P5.2 18.72,47.83 ; P5.2 16.84,47.83 ; P5.2 18.72,49.71
+5V: length 79.6
  TOP w0.305: U2.9 30.07,27.57 29.81,27.3 C3.2 ; 25.09,17.65 U6.2 27.23,17.65 ; U4.14 25.65,31.94 ; U4.14 26.85,31.41 ; U4.14 24.64,31.41 24.46,31.59 C24.2 ; 28.83,31.88 29.24,31.47 U2.3 ; SDP.1 v3(4.8,12.17)
  TOP w0.508: R14.2 18.59,14.91 ; R14.2 17.69,15.76 ; R14.2 19.5,15.76 ; C4.2 27.17,45.25 ; C24.2 v3(24.46,34.09) ; C13.2 27.4,16.33 ; C13.2 28.07,16.38 U6.1 ; C13.2 29.21,16.33 UNK+5VA.1 29.97,17.45 DS1.A
  TOP w0.635: T1.2 28.51,44.11 28.48,44.15 C4.2 25.85,44.15 ; 26.16,15.76 U6.1 U6.2 ; C13.2 28.12,15.58 ; C3.2 v3(28.45,27.3)
  TOP w1.27: T1.2 T1.3
  BOTTOM w0.635: v3(28.45,27.3) 27.74,26.59 27.74,20.4 30.15,17.98 UNK+5VA.1
  BOTTOM w1.016: v3(24.46,34.09) 24.46,28.78 20.45,24.77 15.11,24.77 6.1,15.75 6.1,13.46 v3(4.8,12.17)
+5VA: length 42.7
  TOP w0.305: U2.18 40.39,31.47 40.79,31.62 C5.1
  TOP w0.508: 59.12,54.28 E4.1 58.24,53.34 ; C14.2 56.12,53.17 ; C14.2 57.93,53.17 ; C14.2 57.02,54.03 ; TP4.1 53.89,52.49 ; TP4.1 55.59,52.49 ; TP4.1 53.89,54.19 ; TP4.1 55.59,54.19 ; v1(41.66,31.62) C5.1
  BOTTOM w0.635: v1(41.66,31.62) 41.66,45.72 49.28,53.34 TP4.1
+5VA_ISO: length 17.8
  TOP w0.254: C31.2 75.21,26.9 U5.39
  TOP w0.305: FL6.3 69.09,55.59 ; FL6.3 69.8,54.98 ; FL6.3 68.37,54.98
  TOP w0.508: 71.63,55.5 C18.2 72.74,54.55
  TOP w0.635: UNK+5V.1 73.19,53.51 ; UNK+5V.1 74.89,55.21 ; UNK+5V.1 74.89,53.51 ; UNK+5V.1 73.19,55.21 ; C31.2 74.36,27.75 C30.2 72.33,27.69 v3(70.36,27.69) DS2.A
  L3_PWR w1.143: UNK+5V.1 75.56,54.36
AGND: length 34.1
  TOP w0.305: 38.61,26.29 U2.11 39.41,26.92 R6.2 ; C5.2 40.72,32.89 v1(40,32.18) 39.95,32.13 39.88,32.13 39.87,32.12 U2.19
  TOP w0.381: v1(45.8,23.88) C7.1 v1(46.74,25.35)
  TOP w0.508: 63.02,36.15 E12.1 63.02,34.72
  TOP w0.635: v1(48.9,25.91) C10.1 v1(49.78,26.8) ; T1.7 39.53,44.11 ; v1(43.56,34.04) 43.56,33.62 R7.1 40.96,32.85 C5.2 ; C9.2 v1(54.36,44.32) ; C8.1 v1(54.36,41.91) ; T1.6 39.53,42.1 ; v1(62.1,35.43) E12.1 ; C11.1 v1(49.91,28.83) ; C12.1 v1(50.16,30.73)
  TOP w1.016: C15.1 v3(57.53,41.36) ; R6.2 39.15,25.44 ; C16.2 v3(57.66,46.52) ; v3(57.02,50.29) C14.1 57.95,51.47 58.37,51.05 E5.1 v3(59.25,49.85) ; E2.1 v3(57.78,43.94)
  BOTTOM w0.305: 45.72,25.53 45.72,26.04
  vias: v1(38.86,56.01) v1(38.86,51.94) v1(38.86,47.88) v1(38.86,43.81) v1(38.86,39.75) v1(38.86,35.69) v1(38.86,24) v1(38.86,19.94) v1(42.93,56.01) v1(42.93,19.94) v1(45.97,18.67) v1(45.97,14.61) v1(45.97,10.54) v1(45.97,6.48) v1(45.97,2.41) v1(46.99,56.01) v1(50.04,2.41) v1(51.05,56.01) v1(54.1,2.41) v1(55.12,56.01) v1(58.17,2.41) v1(59.18,56.01) v1(62.23,2.41) v1(62.36,56.01) v1(62.36,52.2) v1(62.36,45.21) v1(62.36,42.67) v1(62.36,39.75) v1(62.36,31.62) v1(62.36,27.56) v1(62.36,23.49) v1(62.36,19.43) v1(62.36,15.37) v1(62.36,11.3) v1(62.36,7.24) v1(62.48,48.39)
AVDD: length 25.2
  TOP w0.305: 50.25,37.81 50.15,37.7 ; U2.20 39.63,32.77 39.88,33.02 39.88,33.87 R13.2
  TOP w0.508: L1.2 52.51,39.44 52.83,39.12 51.52,39.12
  TOP w0.635: 60.96,38.68 E1.1 58.9,39.56 C15.2 ; 40.81,36.11 R13.2 ; C15.2 58.8,38.81 ; C15.2 57.9,39.66 ; C15.2 59.71,39.66 ; TP3.1 50.25,36.11 ; TP3.1 50.15,37.7 ; TP3.1 48.55,37.81 ; TP3.1 L1.2 ; TP3.1 48.51,36.07 ; 54.14,39.12 52.83,39.12 52.83,38.01
AVDD_ISO: length 29.6
  TOP w0.254: U5.36 76.71,26.93
  TOP w0.508: 71.65,35.81 C29.2 72.49,35.94 U7.2
  TOP w0.635: C33.2 83.53,22.59 ; C33.2 84.38,23.49 ; C33.2 C32.2 83.53,26.38 ; FL7.3 68.96,42.13 ; FL7.3 68.25,41.52 ; FL7.3 69.67,41.52 ; C19.2 71.5,42.42 ; C19.2 72.61,41.47 ; C19.2 70.39,41.47 ; 71.47,36.39 C28.2 70.36,37.59 ; 81.47,26.86 C35.2 ; C35.2 81.47,29.05 ; C35.2 80.52,27.94 ; 79.13,10.02 CR3.2 78.16,10.97 ; 78.23,28.45 C37.2 77.47,27.69 ; CR2.2 78.75,40.65 ; CR2.2 77.77,41.35 ; CR2.2 78.75,42.05 ; AVDD.1 74.76,40.55 ; AVDD.1 73.06,42.25 ; AVDD.1 74.76,42.25 ; C29.2 72.36,36.57
AVSS: length 8.6
  TOP w0.635: C16.1 58.9,48.32 E3.1
  TOP w0.762: L2.2 51.31,46.92 51.51,47.12 C9.1 v3(54.48,47.12) ; C16.1 v3(57.53,48.22)
AVSS_ISO: length 36.6
  TOP w0.254: U5.37 76.21,27.8 C26.2 ; 75.93,18.4 75.93,19 76.21,19.28 U5.14 76.21,22.11 U5.PAD
  TOP w0.305: 75.93,18.4 75.5,17.97 75.5,14.54 77.19,12.85 CR3.1 v1(79.13,14.08)
  TOP w0.508: C17.1 72.74,46.16 ; C17.1 71.63,45.21 ; C17.1 70.52,46.16 ; 73.63,45.61 CR4.A ; 68.25,46.24 FL5.3 ; FL5.3 68.96,45.63 ; FL5.3 69.67,46.24 ; C26.2 76.33,27.94 77.91,29.53 C25.2
  TOP w0.635: C25.2 v3(77.91,31.75) ; CR4.A 78.6,45.61 AVSS.1 78.74,43.24 CR2.1
  L3_PWR w0.305: 79.68,44.52 AVSS.1 79.68,46.41
DGND: length 149.6
  TOP w0.305: 1.78,42.8 1.81,42.77 SDP.52 v1(4.44,42.77) ; v1(4.44,33.17) SDP.36 1.8,33.17 ; SDP.98 v1(7.37,25.37) ; 1.82,28.37 SDP.28 v1(4.44,28.37) ; v1(4.44,39.17) SDP.46 1.96,39.17 ; v1(7.42,15.17) SDP.115 ; SDP.63 v1(7.37,46.37) ; 1.83,21.77 SDP.17 v1(4.57,21.77) ; C3.1 29.52,26.04 30.41,26.92 U2.10 31.5,26.29 ; 1.83,15.17 SDP.6 v1(4.39,15.17) ; SDP.69 v1(7.37,42.77) ; 1.94,25.37 SDP.23 v1(4.41,25.37) ; U2.2 29.73,32.12 v1(29.08,32.77) ; U1.7 v1(23.88,43.3) ; v1(4.44,35.57) SDP.40 1.79,35.57 ; 1.81,13.97 SDP.4 4.19,13.97 v1(4.44,13.72) 4.1,13.37 SDP.3 1.81,13.37 ; SDP.86 v1(7.42,32.57) ; 1.79,18.17 SDP.11 v1(4.57,18.17) ; SDP.109 v1(7.49,18.77) ; SDP.104 v1(7.49,21.77) ; 1.92,46.37 SDP.58 v1(4.57,46.37) ; SDP.118 7.59,13.37 v1(7.37,13.59) 7.74,13.97 SDP.117 ; v1(7.37,35.56) 7.37,35.57 SDP.81 ; SDP.75 v1(7.37,39.17) ; SDP.93 v1(7.37,28.37)
  TOP w0.33: 17.08,40.91 16.64,41.35 U1.4 v1(17.77,42)
  TOP w0.381: U4.7 v1(18.33,27.51)
  TOP w0.508: 17.08,40.91 C21.1 v1(18.04,39.8) ; v1(26.67,33.15) 26.62,33.2 C24.1 v1(25.73,33.91) ; v1(14.1,41.2) R2.2 v1(12.99,42.25) ; FL1.2 14.99,16.64 14.61,17.02 C20.1
  TOP w0.635: v1(40.26,7.49) 40,7.23 P2.2 ; 30.76,25.04 v1(29.44,25.04) C3.1 v1(28.57,26.04) ; v1(25.58,41.35) C4.1 v1(27.17,40.24) ; P2.3 40,13.33 v1(40.26,13.59) ; P2.3 v1(41.66,11.57) ; P2.3 40,9.66 v1(40.26,9.4) ; C1.1 30.76,50.02 ; C1.1 30.76,48.59 ; C1.1 31.51,49.3 ; v1(14.48,10.16) CR1.A v1(12.95,12.45) ; C13.1 28.12,18.62 v1(28.07,18.67) ; v1(17.96,19.18) C6.1 18.92,18.92 U6.6 22.86,18.92 U6.PAD 24.13,18.92 U6.3 27.18,18.92 27.43,18.67 v1(28.07,18.67) ; v1(28.07,18.67) 28.32,18.92 R15.2 ; v1(16.38,37.06) C22.1 v1(17.13,37.77) ; P2.2 v1(40,3.3) ; P2.2 v1(41.66,5.47) ; C20.1 v1(13.51,17.86) ; v1(26.76,25.69) C23.1 v1(25.73,24.98) ; U3.3 v1(15.63,27.3) ; R3.2 v1(15.11,46.02) ; C2.1 31.51,36.86 ; C2.1 30.76,37.57 ; C2.1 30.76,36.14
  TOP w1.016: 21.97,3.17 22.84,4.05 P3.2 23.76,3.15 ; U6.PAD v3(23.49,21.59)
  L2_GND w0.635: 23.85,3.06 P3.2 21.87,3.06 ; 16.84,55.58 PMOD.5 ; PMOD.5 18.72,53.69 ; PMOD.5 18.72,55.58 ; PMOD.5 16.84,53.69 ; 16.84,53.04 PMOD.11 ; PMOD.11 18.72,53.04 ; PMOD.11 16.84,51.15 ; PMOD.11 18.72,51.15
  L3_PWR w0.635: 23.85,3.06 P3.2 21.87,3.06
  BOTTOM w0.635: PMOD.5 18.72,55.58 ; PMOD.5 16.84,53.69 ; PMOD.5 18.72,53.69 ; PMOD.5 16.84,55.58 ; PMOD.11 18.72,53.04 ; PMOD.11 16.84,53.04 ; PMOD.11 16.84,51.15 ; PMOD.11 18.72,51.15
  BOTTOM w1.016: 21.87,3.06 P3.2 23.85,3.06
  vias: v1(2.03,50.04) v1(2.03,10.29) v1(2.03,2.16) v1(2.41,52.7) v1(2.41,7.49) v1(9.02,2.03) v1(10.16,55.88) v1(12.57,2.03) v1(14.99,56.01) v1(16.64,2.03) v1(19.05,56.01) v1(20.7,2.03) v1(23.11,56.01) v1(24.77,2.03) v1(27.18,56.01) v1(28.83,2.03) v1(31.24,56.01) v1(31.24,51.94) v1(31.24,47.88) v1(31.24,43.81) v1(31.24,39.75) v1(31.24,35.69) v1(31.24,25.78) v1(31.24,23.49) v1(31.24,19.43) v1(31.5,15.62) v1(32.89,2.03) v1(35.56,15.62) v1(36.96,2.03) v1(39.62,15.62) v1(41.02,13.72) v1(41.02,9.65) v1(41.02,2.03) v1(41.53,6.12)
GND_ISO: length 115.5
  TOP w0.254: v1(76.58,18.73) 76.71,18.86 U5.15 ; U5.34 v1(77.71,26.77) ; U5.3 73.53,24.11 v1(73.03,23.61) ; U5.13 75.71,19.45 v1(75.21,18.95) U5.12 ; U5.23 80.75,21.61 v1(81.03,21.34) ; U5.4 v1(73.03,23.61) ; v1(73.03,23.61) 73.53,23.11 U5.5
  TOP w0.305: 95.28,44.82 VOUT.2 95.28,46.62
  TOP w0.508: FL7.2 70.23,40.51 71.18,39.56 C19.1 ; 95.28,14.72 IOUT.2 95.28,16.52
  TOP w0.635: FL5.2 70.23,47.24 71.06,48.07 C17.2 ; v1(84.58,27.94) C35.1 v1(83.38,29.34) ; v1(65.41,35.43) E12.2 ; E12.2 64.49,34.72 ; E12.2 64.49,36.15 ; C39.1 82.96,46.16 D6.1 v1(86.23,48.13) ; C39.1 v1(81.45,46.19) ; C39.1 v1(82.93,47.37) ; v1(81.15,30.35) C25.1 v1(79.82,31.69) ; U7.4 v1(72.36,33.4) C29.1 70.42,34.54 C28.1 ; C37.1 79.5,27.3 v1(80.14,26.67) ; v1(81.41,18.16) C38.1 v1(80.39,17.02) ; C40.1 v1(82.98,14.4) 83.12,14.54 D7.1 v1(86.21,16.41) ; v1(77.27,14.78) R19.1 v1(78.32,15.91) ; 74.42,28.96 v1(74.42,29.97) ; FL6.2 69.85,53.98 71.18,52.64 C18.1 ; v1(82.42,37.72) C34.1 84.01,36.51 C36.1 v1(85.34,36.07) ; C28.1 v1(69.02,34.48) ; C28.1 v1(70.36,33.27) ; v1(72.39,30.86) C30.1 v1(71.06,29.65) ; C26.1 v1(76.07,30.1)
  TOP w0.889: v3(74.55,50.16) CR4.C 73.46,48.88 72.64,48.07 C17.2
  TOP w1.016: E7.2 v3(69.47,50.93) ; C18.1 71.82,52.45 v3(73.03,52.45) ; E9.2 v3(70.23,43.81) ; C19.1 v3(73.03,39.56)
  L2_GND w0.635: 93.4,16.61 IOUT.2 ; IOUT.2 95.37,16.61 ; IOUT.2 93.4,14.64 ; IOUT.2 95.37,14.64 ; GND.1 80.57,50.47 ; GND.1 78.69,48.59 ; GND.1 78.69,50.47 ; GND.1 80.57,48.59 ; 93.4,46.71 VOUT.2 ; VOUT.2 95.37,46.71 ; VOUT.2 93.4,44.73 ; VOUT.2 95.37,44.73
  L3_PWR w0.305: 95.37,44.73 VOUT.2 95.37,46.71
  L3_PWR w0.635: 95.37,14.64 IOUT.2 95.37,16.61
  BOTTOM w0.635: IOUT.2 95.37,16.61 ; IOUT.2 93.4,16.61 ; IOUT.2 93.4,14.64 ; IOUT.2 95.37,14.64 ; VOUT.2 95.37,44.73 ; VOUT.2 93.4,46.71 ; VOUT.2 93.4,44.73 ; VOUT.2 95.37,46.71 ; 78.69,48.59 GND.1 ; GND.1 78.69,50.47 ; GND.1 80.57,48.59 ; GND.1 80.57,50.47
  vias: v1(65.02,56.39) v1(65.02,52.2) v1(65.02,48.01) v1(65.02,45.21) v1(65.02,42.8) v1(65.02,39.88) v1(65.02,31.75) v1(65.02,27.69) v1(65.02,23.62) v1(65.02,19.56) v1(65.02,15.49) v1(65.02,11.43) v1(65.02,7.37) v1(65.02,3.3) v1(69.09,56.39) v1(69.09,2.41) v1(73.15,56.39) v1(73.15,2.41) v1(77.22,56.39) v1(77.22,2.41) v1(81.28,2.41) v1(85.34,56.39) v1(85.34,2.41) v1(89.41,56.39) v1(89.41,2.41) v1(93.47,2.41) v1(93.98,56.39) v1(95.76,42.04) v1(95.76,13.59) v1(95.76,9.52) v1(95.88,54.23) v1(95.88,50.16) v1(95.88,46.1) v1(95.88,37.97) v1(95.88,33.91) v1(95.88,29.84) v1(95.88,25.78) v1(95.88,21.72) v1(95.88,17.65) v1(95.88,5.46)
LATCH: length 6.8
  TOP w0.305: U4.10 26.81,28.81 v1(27.05,28.57) ; U2.5 v1(29.84,30.17)
  BOTTOM w0.254: v1(29.84,30.17) 28.39,30.17 27.05,28.83 v1(27.05,28.57)
LATCH_ISO: length 32.8
  TOP w0.254: LATCH.1 68.59,22.61 U5.6
  TOP w0.305: R8.2 47.62,30.61 C12.2 v1(47.75,31.75)
  BOTTOM w0.305: v1(47.75,31.75) 55.12,31.75 64.26,22.61 LATCH.1
LATCH_SDP: length 46.6
  TOP w0.305: v1(21.59,28.07) 20.84,28.81 U4.5 17.8,28.81 R16.1 17.02,29.08 16.64,29.46 14.1,29.46 13.73,29.1 U3.1 13.21,28.45 12.45,29.21 12.45,31.37 10.65,33.17 SDP.85
  BOTTOM w0.305: v1(21.59,28.07) 23.11,29.59 23.11,47.62 26.67,51.18 26.67,53.37 PMOD.1
SCL_0: length 18.2
  TOP w0.305: SDP.79 11.1,36.77 11.8,36.07 16.88,36.07 18.8,37.99 18.8,40.56 20.88,42.65 U1.6
SCLK: length 6.4
  TOP w0.254: U2.6 29.15,29.52 27.91,30.76 U4.13
SCLK_ISO: length 34.9
  TOP w0.254: SCLK.1 70.87,22.1 70.87,22.11 U5.7
  TOP w0.305: R9.2 C11.2 v1(47.75,29.72)
  BOTTOM w0.305: SCLK.1 67.44,18.67 64.77,18.67 53.72,29.72 v1(47.75,29.72)
SCLK_SDP: length 38.1
  TOP w0.305: v1(16.95,32.32) 16.95,33.21 15.2,34.97 SDP.82 ; v1(18.54,30.73) 18.8,30.73 18.83,30.76 U4.2
  BOTTOM w0.305: v1(18.54,30.73) v1(16.95,32.32) 16.95,35.12 21.59,39.75 21.59,53.37 PMOD.4
SDA_0: length 18.2
  TOP w0.305: U1.5 21,42 19.43,40.44 19.43,37.77 17.22,35.56 11.45,35.56 10.85,36.17 SDP.80
SDIN: length 6.3
  TOP w0.254: v1(29.72,28.87) U2.7
  TOP w0.305: U4.11 27.3,29.46 27.94,28.83 v1(27.94,28.7)
  BOTTOM w0.254: v1(27.94,28.7) 28.11,28.87 v1(29.72,28.87)
SDIN_ISO: length 36.5
  TOP w0.254: SDIN.1 70.43,18.49 70.43,19.48 72.56,21.61 U5.8
  TOP w0.305: R10.2 46.86,27.05 47.12,26.8 C10.2 v1(47.62,27.81)
  BOTTOM w0.305: SDIN.1 64.01,16.64 52.83,27.81 v1(47.62,27.81)
SDIN_SDP: length 43.1
  TOP w0.305: SDP.84 12.59,33.77 v1(13.08,33.27) ; v1(21.46,29.34) 20.95,29.34 20.83,29.46 U4.4
  L2_GND w0.305: v1(13.08,33.27) 13.72,33.27 17.65,29.34 v1(21.46,29.34)
  BOTTOM w0.305: v1(21.46,29.34) 22.23,30.1 22.23,48.26 24.13,50.16 24.13,53.37 PMOD.2
SDO: length 6.6
  TOP w0.254: U2.8 29.44,28.22 27.54,30.11 U4.12
SDO_ISO: length 41.5
  TOP w0.254: U5.9 73.31,21.11 71.63,19.43 71.63,16.76 SDO.1
  TOP w0.305: R11.2 44.07,25.78 C7.2 v1(44.53,24.43)
  BOTTOM w0.305: SDO.1 65.28,13.72 62.17,16.83 61.15,16.83 53.34,24.64 44.73,24.64 v1(44.53,24.43)
SDO_SDP: length 33.7
  TOP w0.305: SDP.83 13.51,34.37 v1(13.72,34.16) 15.63,32.25 U3.4
  L2_GND w0.305: PMOD.3 21.59,53.37 21.59,49.78 13.21,41.4 13.21,34.67 v1(13.72,34.16)
UNNAMED_2_AD54X2_I3_: length 34.4
  TOP w0.254: U5.32 v1(78.71,26.77) 78.21,26.27 U5.33
  TOP w0.635: R20.1 81.47,40.45 80.76,41.16 CR2.3 v1(80.76,44.45)
  BOTTOM w0.508: P4.2 80.72,24.77 v1(78.71,26.77) 78.71,29.31 80.76,31.36 v1(80.76,44.45)
UNNAMED_2_AD54X2_I3_CAP1: length 2.1
  TOP w0.254: C33.1 81.21,24.11 U5.28
UNNAMED_2_AD54X2_I3_CAP2: length 2.2
  TOP w0.254: C32.1 80.93,24.61 U5.29
UNNAMED_2_AD54X2_I3_CCOMP: length 2.3
  TOP w0.254: U5.24 81.52,22.11 C27.2
UNNAMED_2_AD54X2_I3_FAULTN: length 2.1
  TOP w0.254: U5.2 73.05,24.61 72.64,25.02 R18.1
UNNAMED_2_AD54X2_I3_IOUT: length 28.5
  TOP w0.254: U5.26 v1(80.77,23.11)
  TOP w0.305: v1(81.03,13.84) 81.03,12.03 CR3.3
  TOP w0.508: IOUT.1 90.02,10.54 89.32,9.84 D7.2 84.25,9.84 C40.2 81.94,11.11 CR3.3
  BOTTOM w0.254: v1(81.03,13.84) 81.03,14.22 78.36,16.89 78.36,20.7 v1(80.77,23.11)
UNNAMED_2_AD54X2_I3_REFIN: length 33.3
  TOP w0.254: 79.12,18.16 78.21,19.07 U5.18
  TOP w0.305: 79.12,18.16 v1(79.12,17.27)
  TOP w0.508: UNK+5VREF.1 84.46,32.84 84.46,34.8 84.26,34.61 C34.2 82.36,34.67 U7.6
  BOTTOM w0.305: v1(79.12,17.27) 81.28,19.43 86.23,19.43 87.88,21.08 87.88,26.92 84.56,30.25 UNK+5VREF.1
UNNAMED_2_AD54X2_I3_RSET: length 2.3
  TOP w0.254: R19.2 77.27,19.3 77.21,19.35 U5.16
UNNAMED_2_CAP_I65_N1: length 3.1
  TOP w0.305: C27.1 85.47,21.59 P4.1
UNNAMED_2_CAP_I160_N2: length 14.5
  TOP w0.508: C39.2 82.93,43.31 82.8,43.18 R20.2 84.26,42.35 85.15,41.47 D6.2 89.6,41.47 90.42,40.64 VOUT.1
UNNAMED_2_DIOLED_I147_N: length 2.2
  TOP w0.305: DS2.C 71.56,23.75 R18.2
UNNAMED_3_ADP7104_I58_PG: length 2.3
  TOP w0.508: U6.7 19.3,17.65 19.11,17.46 R14.1
UNNAMED_3_ADP7104_I58_VIN: length 14.2
  TOP w0.508: 19.76,20.19 U6.5 20.83,20.82 ; C6.2 17.96,20.5 ; C6.2 18.67,21.34 v3(18.92,21.59) ; C6.2 19.38,20.5 ; D1.C 16.38,23.19 ; D1.C 17.39,21.77 ; D1.C 15.38,21.77 ; U6.8 20.07,16.38 v1(19.69,16.76)
  BOTTOM w0.508: v3(18.92,21.59) 19.69,20.83 v1(19.69,16.76)
UNNAMED_3_ADUM3471_I1_FB: length 6.9
  TOP w0.305: R12.1 43.56,31.15 R7.2 42.47,30.82 U2.17
UNNAMED_3_ADUM3471_I1_OC: length 2.5
  TOP w0.305: U2.12 40.46,27.57 R6.1
UNNAMED_3_ADUM3471_I1_VID: length 4.8
  TOP w0.305: U2.13 41.88,28.22 42.8,27.3 R11.1
UNNAMED_3_ADUM3471_I1_VOA: length 6.3
  TOP w0.305: R8.1 44.27,30.17 U2.16
UNNAMED_3_ADUM3471_I1_VOB: length 6.4
  TOP w0.305: R9.1 44.45,28.83 43.76,29.52 U2.15
UNNAMED_3_ADUM3471_I1_VOC: length 6.7
  TOP w0.305: R10.1 42.76,28.87 U2.14
UNNAMED_3_ADUM3471_I1_X1: length 13.2
  TOP w0.305: U2.1 30.35,32.77 v1(29.84,33.27)
  TOP w0.635: T1.4 29.08,40.09 28.05,39.06 R5.2 27.29,38.86 v1(26.16,38.86)
  L2_GND w0.635: v1(26.16,38.86) 29.84,35.18 v1(29.84,33.27)
UNNAMED_3_ADUM3471_I1_X2: length 24.5
  TOP w0.305: v1(27.69,31.75) 28.62,30.82 29.54,30.82 29.57,30.84 30.12,30.84 30.15,30.82 U2.4
  TOP w0.635: v1(26.1,46.41) R4.2 28.7,46.41 29,46.11 T1.1
  L2_GND w0.635: v1(27.69,31.75) 27.69,35.18 25.15,37.72 25.15,39.73 26.42,41 26.42,46.1 v1(26.1,46.41)
UNNAMED_3_CAP_I104_N2: length 4.4
  TOP w0.635: 29.49,48.59 C1.2 28.73,49.3 ; R4.1 27.51,49.27 ; R4.1 26.5,48.32 ; R4.1 28.51,48.32
UNNAMED_3_CAP_I112_N2: length 4.4
  TOP w0.635: 28.74,36.86 C2.2 29.49,36.14 ; R5.1 27.48,36.2 ; R5.1 26.48,37.15 ; R5.1 28.49,37.15
UNNAMED_3_CN2P_I172_N1: length 21.6
  TOP w0.635: TP1.1 24.17,12.41 ; TP1.1 25.87,10.71 ; TP1.1 24.17,10.71 ; TP1.1 25.87,12.41 ; 28.58,7.36 P2.1 26.94,5.47 ; 23.14,10.95 F1.1 21.59,10.14
  TOP w1.016: v2(28.58,11.57) 30.29,11.57 30.29,5.47 P2.1
  TOP w1.143: P3.1 17.78,5.46
UNNAMED_3_DIO_I9_P: length 4.3
  TOP w0.508: FL1.3 16.97,17.64 ; FL1.3 15.37,17.64 ; FL1.3 16.18,18.27 16.38,18.47 D1.A 15.38,19.22
UNNAMED_3_DIOLED_I143_N: length 1.7
  TOP w0.508: R15.1 28.36,20.99 DS1.C
UNNAMED_3_DIOSCHOTTKY_I14_P: length 5.8
  TOP w0.508: D3.C D2.A 41.94,46.11 T1.8
UNNAMED_3_DIOSCHOTTKY_I15_P: length 5.4
  TOP w0.508: L2.1 48.96,44.08 D3.A D5.A
UNNAMED_3_DIOSCHOTTKY_I115_N: length 8.2
  TOP w0.635: L1.1 48.01,41.84 47.57,42.28 v1(47.38,42.28) ; v1(44.45,42.28) D4.C D2.C
  BOTTOM w0.635: v1(44.45,42.28) v1(47.38,42.28)
UNNAMED_3_DIOSCHOTTKY_I115_P: length 5.7
  TOP w0.508: D5.C D4.A 43.17,38.99 42.16,38.99 41.06,40.09 T1.5
UNNAMED_3_DIOZNR_I6_N: length 8.3
  TOP w0.635: F1.2 20.04,13.94 CR1.C 17.78,12.45 16.18,14.05 FL1.1
UNNAMED_3_FERRITE_I80_N2: length 2
  TOP w0.508: FL3.1 62.3,41.47 E1.2
UNNAMED_3_FERRITE_I81_N2: length 12.1
  TOP w0.61: FL3.2 FL2.2
  TOP w1.143: E9.1 66.99,43.94 E2.2
UNNAMED_3_FERRITE_I82_N2: length 2
  TOP w0.508: E3.2 62.3,46.42 FL2.1
UNNAMED_3_FERRITE_I87_N1: length 2
  TOP w0.508: FL3.3 66.1,41.02 E8.1
UNNAMED_3_FERRITE_I87_N2: length 2.4
  TOP w0.508: E8.2 66.6,39.51 FL7.1
UNNAMED_3_FERRITE_I89_N1: length 2
  TOP w0.508: FL2.3 66.1,46.86 E10.1
UNNAMED_3_FERRITE_I89_N2: length 2.4
  TOP w0.508: E10.2 66.62,48.25 FL5.1
UNNAMED_3_FERRITE_I120_N1: length 2.7
  TOP w0.508: FL4.3 64.89,54.09 65.6,54.8 E6.1
UNNAMED_3_FERRITE_I120_N2: length 2.4
  TOP w0.508: FL6.1 66.75,52.97 E6.2
UNNAMED_3_FERRITE_I121_N1: length 8
  TOP w0.61: 63.75,51.05 63.88,51.18 FL4.2
  TOP w1.143: E7.1 66.48,51.05 E5.2
UNNAMED_3_FERRITE_I125_N2: length 1.9
  TOP w0.508: FL4.1 62.23,53.47 62.1,53.34 E4.2
UNNAMED_3_RES_I34_N2: length 2.6
  TOP w0.305: R13.1 44.16,34.8 R12.2
UNNAMED_4_CN12PV3_I72_VCC1: length 5.9
  TOP w0.762: PMOD.6 PMOD.12 P5.1
UNNAMED_4_CN120PV4_I1_EEPROMA0: length 14
  TOP w0.305: U1.1 14.1,43.95 R2.1 v1(12.74,43.95) ; v1(4.53,45.17) SDP.56
  BOTTOM w0.305: v1(12.74,43.95) 11.53,45.17 v1(4.53,45.17)
UNNAMED_4_IC24FC256_I3_A1: length 6
  TOP w0.254: U1.2 17.72,43.3 17.87,43.45 R3.1 R1.2
UNNAMED_4_SN74LVC1G125DBV_I36_A: length 9.9
  TOP w0.305: U4.3 21.07,30.11 v1(21.08,30.1) ; U3.2 v1(14.68,27.38)
  BOTTOM w0.305: v1(14.68,27.38) 16.51,29.21 20.19,29.21 v1(21.08,30.1)

## Copper pours and planes (outline as drawn; the poured copper is in the pictures)
+3.3VIO on TOP: 13.33,40.31 13.33,36.63 15.49,36.63 15.49,40.31
+3.3VIO on L3_PWR: 29.59,14.22 15.37,14.22 15.11,13.97 15.11,3.94 14.86,3.68 3.94,3.68 3.68,3.94 3.68,54.48 3.94,54.74 29.72,54.74 29.84,54.61 29.84,14.48
+5V on TOP: 3.68,54.48 3.94,54.74 29.72,54.74 29.84,54.61 29.84,49.91 29.97,49.91 29.97,35.43 29.84,35.43 29.84,33.78 29.97,33.78 29.97,31.88 29.84,31.88 29.84,31.12 29.97,31.12 29.97,24.51 29.84,24.51 29.84,21.46 29.97,21.46 29.97,20.57 29.59,20.57 29.59,21.72 28.83,21.72 28.83,18.92 29.84,18.92 29.84,14.48 29.59,14.22 15.11,14.22 15.11,3.94 14.86,3.68 3.81,3.68 3.68,3.81 ; 16 cut-outs
+5VA on TOP: 53.47,52.2 53.47,54.99 53.59,55.12 59.44,55.12 59.56,54.99 59.56,52.83 56.13,52.83 56.13,52.2 56.01,52.07 53.59,52.07
+5VA on L3_PWR: 32.64,21.46 32.64,34.54 32.89,34.8 46.35,34.8 46.61,34.54 46.61,27.05 46.86,26.8 60.83,26.8 61.09,26.54 61.09,3.94 60.83,3.68 47.37,3.68 47.24,3.81 47.24,20.95 46.99,21.21 32.89,21.21
+5VA_ISO on TOP: 67.94,55.75 67.94,54.74 71.25,54.74 71.25,54.23 72.77,54.23 72.77,53.09 75.44,53.09 75.44,55.75
+5VA_ISO on L3_PWR: 69.34,25.53 69.09,25.78 69.09,27.94 69.34,28.19 71.5,28.19 71.5,36.58 71.75,36.83 75.56,36.83 75.69,36.96 75.69,49.66 75.44,49.91 72.26,49.91 72.14,50.04 72.14,54.74 72.39,54.99 77.47,54.99 77.47,34.16 77.22,33.91 74.93,33.91 74.93,25.91 74.55,25.53
AGND on TOP: 44.96,1.65 44.96,18.67 44.7,18.92 38.1,18.92 37.85,19.18 37.85,56.77 38.1,57.02 63.12,57.02 63.37,56.77 63.37,41.15 61.47,41.15 61.47,54.86 61.21,55.12 60.07,55.12 59.82,55.37 53.21,55.37 52.96,55.12 40,55.12 39.75,54.86 39.75,21.08 40,20.83 46.61,20.83 46.86,20.57 46.86,3.56 47.12,3.3 61.21,3.3 61.47,3.56 61.47,40.26 63.37,40.26 63.37,1.65 63.12,1.4 45.21,1.4
AGND on BOTTOM: 45.21,1.4 44.96,1.65 44.96,18.67 44.7,18.92 38.1,18.92 37.85,19.18 37.85,56.77 38.1,57.02 63.12,57.02 63.37,56.77 63.37,54.86 63.12,54.61 54.61,54.61 54.36,54.36 54.36,50.8 54.61,50.55 61.72,50.55 61.85,50.67 61.85,52.2 62.1,52.45 63.12,52.45 63.37,52.2 63.37,48.01 63.25,47.88 61.85,47.88 61.72,48.01 61.72,48.9 61.59,49.02 58.04,49.02 58.04,48.9 57.91,48.9 57.91,45.59 58.04,45.47 63.25,45.47 63.37,45.34 63.37,42.55 63.25,42.42 58.17,42.42 58.04,42.29 58.04,39.37 58.17,39.24 61.72,39.24 61.98,39.5 61.98,40.26 62.1,40.39 63.25,40.39 63.37,40.26 63.37,1.65 63.12,1.4
AGND on L2_GND: 45.21,1.4 44.96,1.65 44.96,18.67 44.7,18.92 38.1,18.92 37.85,19.18 37.85,56.77 38.1,57.02 63.12,57.02 63.37,56.77 63.37,54.74 63.25,54.61 54.61,54.61 54.36,54.36 54.36,54.1 54.23,54.1 54.23,50.8 54.48,50.55 61.59,50.55 61.98,50.93 61.98,52.32 62.1,52.45 63.25,52.45 63.37,52.32 63.37,48.26 63.25,48.13 62.1,48.13 61.98,48.26 61.98,48.77 61.72,49.02 57.91,49.02 57.91,45.85 58.29,45.47 63.12,45.47 63.37,45.21 63.37,42.55 63.12,42.29 58.17,42.29 57.91,42.04 57.91,38.86 58.17,38.61 61.98,38.61 61.98,39.88 62.23,40.13 63.12,40.13 63.37,39.88 63.37,1.65 63.12,1.4
AGND on L3_PWR: 45.21,1.4 44.96,1.65 44.96,3.17 45.09,3.3 61.21,3.3 61.47,3.56 61.47,54.86 61.21,55.12 37.97,55.12 37.85,55.24 37.85,56.77 38.1,57.02 63.12,57.02 63.37,56.77 63.37,1.65 63.12,1.4
AVDD on TOP: 47.24,3.81 47.24,20.95 46.99,21.21 40.39,21.21 40.13,21.46 40.13,54.48 40.39,54.74 52.83,54.74 53.09,54.48 53.09,52.07 53.34,51.82 58.17,51.82 58.17,50.42 58.04,50.42 58.04,40.26 60.07,40.26 60.07,40.13 61.09,40.13 61.09,3.94 60.83,3.68 47.37,3.68 ; 8 cut-outs
AVDD_ISO on TOP: 66.67,3.68 66.42,3.94 66.42,38.35 66.67,38.61 72.64,38.61 72.64,40.13 67.82,40.13 67.82,40.77 70.48,40.77 70.48,41.15 66.42,41.15 66.42,49.91 66.55,50.04 67.94,50.04 67.94,52.45 75.69,52.45 75.69,54.74 94.36,54.74 94.62,54.48 94.62,3.94 94.36,3.68 ; 15 cut-outs
AVSS on L3_PWR: 46.99,27.56 46.99,34.92 46.74,35.18 32.89,35.18 32.64,35.43 32.64,56.77 32.89,57.02 37.21,57.02 37.47,56.77 37.47,54.99 37.72,54.74 54.23,54.74 54.36,54.61 54.36,50.93 54.74,50.55 58.17,50.55 58.42,50.29 58.42,49.28 57.91,48.77 57.91,45.72 58.17,45.47 60.83,45.47 61.09,45.21 61.09,42.67 60.83,42.42 58.29,42.42 58.04,42.16 58.04,39.62 58.42,39.24 60.83,39.24 61.09,38.99 61.09,27.43 60.83,27.18 47.37,27.18
AVSS_ISO on TOP: 70.23,44.7 70.23,45.34 67.69,45.34 67.69,46.48 70.36,46.48 70.36,46.74 72.9,46.74 72.9,46.23 75.44,46.23 75.44,44.7
AVSS_ISO on L3_PWR: 66.67,3.68 66.42,3.94 66.42,38.35 66.67,38.61 70.23,38.61 70.48,38.86 70.48,42.04 70.23,42.29 66.67,42.29 66.42,42.55 66.42,45.21 66.67,45.47 70.48,45.47 70.48,49.02 66.67,49.02 66.42,49.28 66.42,49.66 66.67,49.91 69.34,49.91 69.34,50.93 69.22,50.93 69.22,51.69 70.36,51.69 70.36,54.74 70.61,54.99 71.5,54.99 71.75,54.74 71.75,49.66 71.88,49.53 75.06,49.53 75.31,49.28 75.31,37.34 75.18,37.21 71.37,37.21 71.12,36.96 71.12,32.64 75.31,32.64 75.31,33.4 75.44,33.53 77.6,33.53 77.85,33.78 77.85,54.48 78.1,54.74 94.36,54.74 94.62,54.48 94.62,3.94 94.36,3.68
DGND on TOP: 1.52,1.52 1.52,56.77 1.78,57.02 32,57.02 32.26,56.77 32.26,16.76 32.51,16.51 41.66,16.51 41.91,16.26 41.91,1.65 41.66,1.4 1.65,1.4 ; 1 cut-out
DGND on BOTTOM: 1.52,56.77 1.78,57.02 32,57.02 32.26,56.77 32.26,16.76 32.51,16.51 41.66,16.51 41.91,16.26 41.91,1.65 41.66,1.4 1.65,1.4 1.52,1.52 ; 3 cut-outs
